# EAGLE board amplifier (EAGLE 7.1.0)
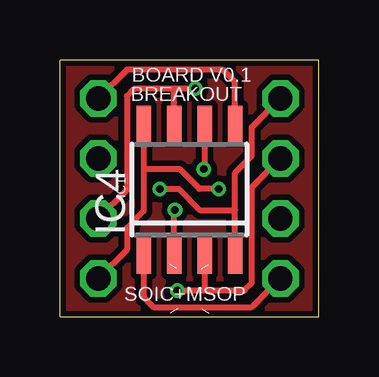
[diagram p0: board, top side]
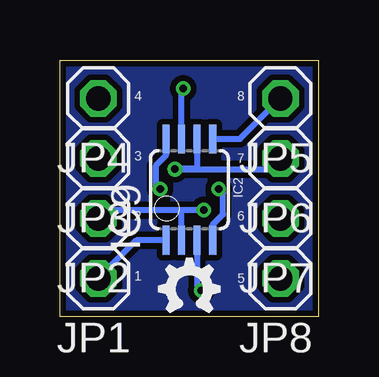
[diagram p1: board, bottom side, seen from below]

Size 10.8 x 10.7 mm. Coordinates in mm from the lower left corner, seen from the top.
Outline: 0,0 0,10.7 10.8,10.7 10.8,0 0,0
Copper layers (1*16): Top 0.035mm / dielectric 1.5mm / Bottom 0.035mm
Design rules "dirt_cheap_dirty_boards.v1": minimum track width 5mil, minimum drill 12mil, track to track 5mil, track to pad 5mil, pad to pad 5mil, via to via 5mil, smd to smd 0mil, copper to edge 10mil, drill to drill 10mil, minimum pad ring 10mil, minimum via ring 6mil, stop-mask expansion 2mil, vias tented up to drill 25mil, thermal gap 10mil
Net classes: 0 default: clearance 0.205 mm

## Footprints (pad centres in the part's own frame; a part is rotated, then mirrored left to right if it is on the bottom)
SOIC8 = smd 0.6 x 1.5: 1 -1.905,-2.75; 2 -0.635,-2.75; 3 0.635,-2.75; 4 1.905,-2.75; 5 1.905,2.75; 6 0.635,2.75; 7 -0.635,2.75; 8 -1.905,2.75
MSOP08 = smd 0.3 x 1.2: 1 -0.976,-2.113; 2 -0.326,-2.113; 3 0.324,-2.113; 4 0.974,-2.113; 5 0.974,2.112; 6 0.324,2.112; 7 -0.326,2.112; 8 -0.976,2.112
1X01 = drill 1.016 octagon: 1 0,0

## Placement (x,y rotation side)
IC4  OPA2134D  [SOIC8]  5.4,5.3 0 top
IC9  [MSOP08]  5.4,5.3 0 bottom
JP1  [1X01]  9.2,1.6 180 bottom
JP2  [1X01]  9.2,4.1 180 bottom
JP3  [1X01]  9.2,6.6 180 bottom
JP4  [1X01]  9.2,9.1 180 bottom
JP5  [1X01]  1.6,9.1 180 bottom
JP6  [1X01]  1.6,6.6 180 bottom
JP7  [1X01]  1.6,4.1 180 bottom
JP8  [1X01]  1.6,1.6 180 bottom

## Library data of the parts
IC4 IC9 = linear
JP1-JP8 = pinhead

## Nets
N$31: IC4.1 IC9.1 JP1.1
N$37: IC4.6 IC9.6 JP6.1
N$40: IC4.7 IC9.7 JP7.1
N$41: IC4.8 IC9.8 JP8.1
N$125: IC4.2 IC9.2 JP2.1
N$126: IC4.3 IC9.3 JP3.1
N$127: IC4.4 IC9.4 JP4.1
N$128: IC4.5 IC9.5 JP5.1

## Tracks (layer width: path | path; a pad name or v marks a point on that pad's centre or on a via)
N$31
  Top 0.254: IC4.1 3.5,0.8 3.9,0.4 8,0.4 JP1.1
  Bottom 0.254: IC9.1 7.61,3.19 JP1.1
N$37  (via drill 0.31)
  Top 0.254: IC4.6 6.04,6.18 v6,6.15
  Bottom 0.254: IC9.6 5.08,6.18 5.97,6.18 v6,6.15 2.05,6.15 JP6.1
N$40  (via drill 0.31)
  Top 0.254: IC4.7 4.76,8.94 4.77,9.5 | 4.77,9.5 3.1,9.5 2.8,9.2 2.8,5.3 JP7.1 | v5.65,9.51 5.44,9.5 4.77,9.5
  Bottom 0.254: IC9.7 5.73,9.43 v5.65,9.51
N$41  (via drill 0.31)
  Top 0.254: IC4.8 3.5,6.09 | 3.5,6.09 3.5,4.4 2.8,3.7 2.8,2.8 JP8.1 | v6.62,5.33 5.82,5.33 5,6.15 3.56,6.15 3.5,6.09
  Bottom 0.254: IC9.8 6.38,6.72 6.81,6.29 6.81,5.52 v6.62,5.33
N$42
  pour Top (isolate 0.24): 10.8,0 0,0 0,10.7 10.8,10.7
N$125  (via drill 0.31)
  Top 0.254: IC4.2 4.76,4.42 v4.8,4.45
  Bottom 0.254: v4.8,4.45 5.69,4.45 | 5.69,4.45 8.86,4.45 JP2.1 | IC9.2 5.73,4.42 5.69,4.45
N$126  (via drill 0.31)
  Top 0.254: IC4.3 6.04,1.21 6.04,1.1 | 6.04,1.1 7.7,1.1 8,1.4 8,5.4 JP3.1 | v4.9,1.1 6.04,1.1
  Bottom 0.254: IC9.3 5.08,1.28 v4.9,1.1
N$127  (via drill 0.31)
  Top 0.254: IC4.4 7.3,4.44 | 7.3,4.44 7.3,6 8,6.7 8,7.9 JP4.1 | v4.17,5.33 4.96,5.33 5.84,4.45 7.29,4.45 7.3,4.44
  Bottom 0.254: IC9.4 4.43,3.83 3.99,4.27 3.99,5.16 v4.17,5.33
N$128
  Top 0.254: IC4.5 7.3,9.79 6.8,10.3 2.8,10.3 JP5.1
  Bottom 0.254: IC9.5 3.29,7.41 JP5.1
S$1
  pour Bottom (isolate 0.24): 0,0 0,10.7 10.8,10.7 10.8,0

## Text on the board
_tsilk: BREAKOUT | BOARD V0.1 | IC1 | SOIC+MSOP
_bsilk: 8 | 4 | 7 | IC2 | 3 | 6 | 2 | 1 | 5